# Altium PCB BugBusterMain.PcbDoc (part 5 of 6)
Units mm, origin at the board's own origin, x right, y up, seen from the top; angles counter-clockwise.
Board outline 110 x 80 mm, 6 copper layers (Top Layer, Inner Layer 1, Inner Layer 2, Inner Layer 3, Inner Layer 4, Bottom Layer), stack 1.546 mm thick; 244 components, 246 nets, 1173 pads, 1169 vias.
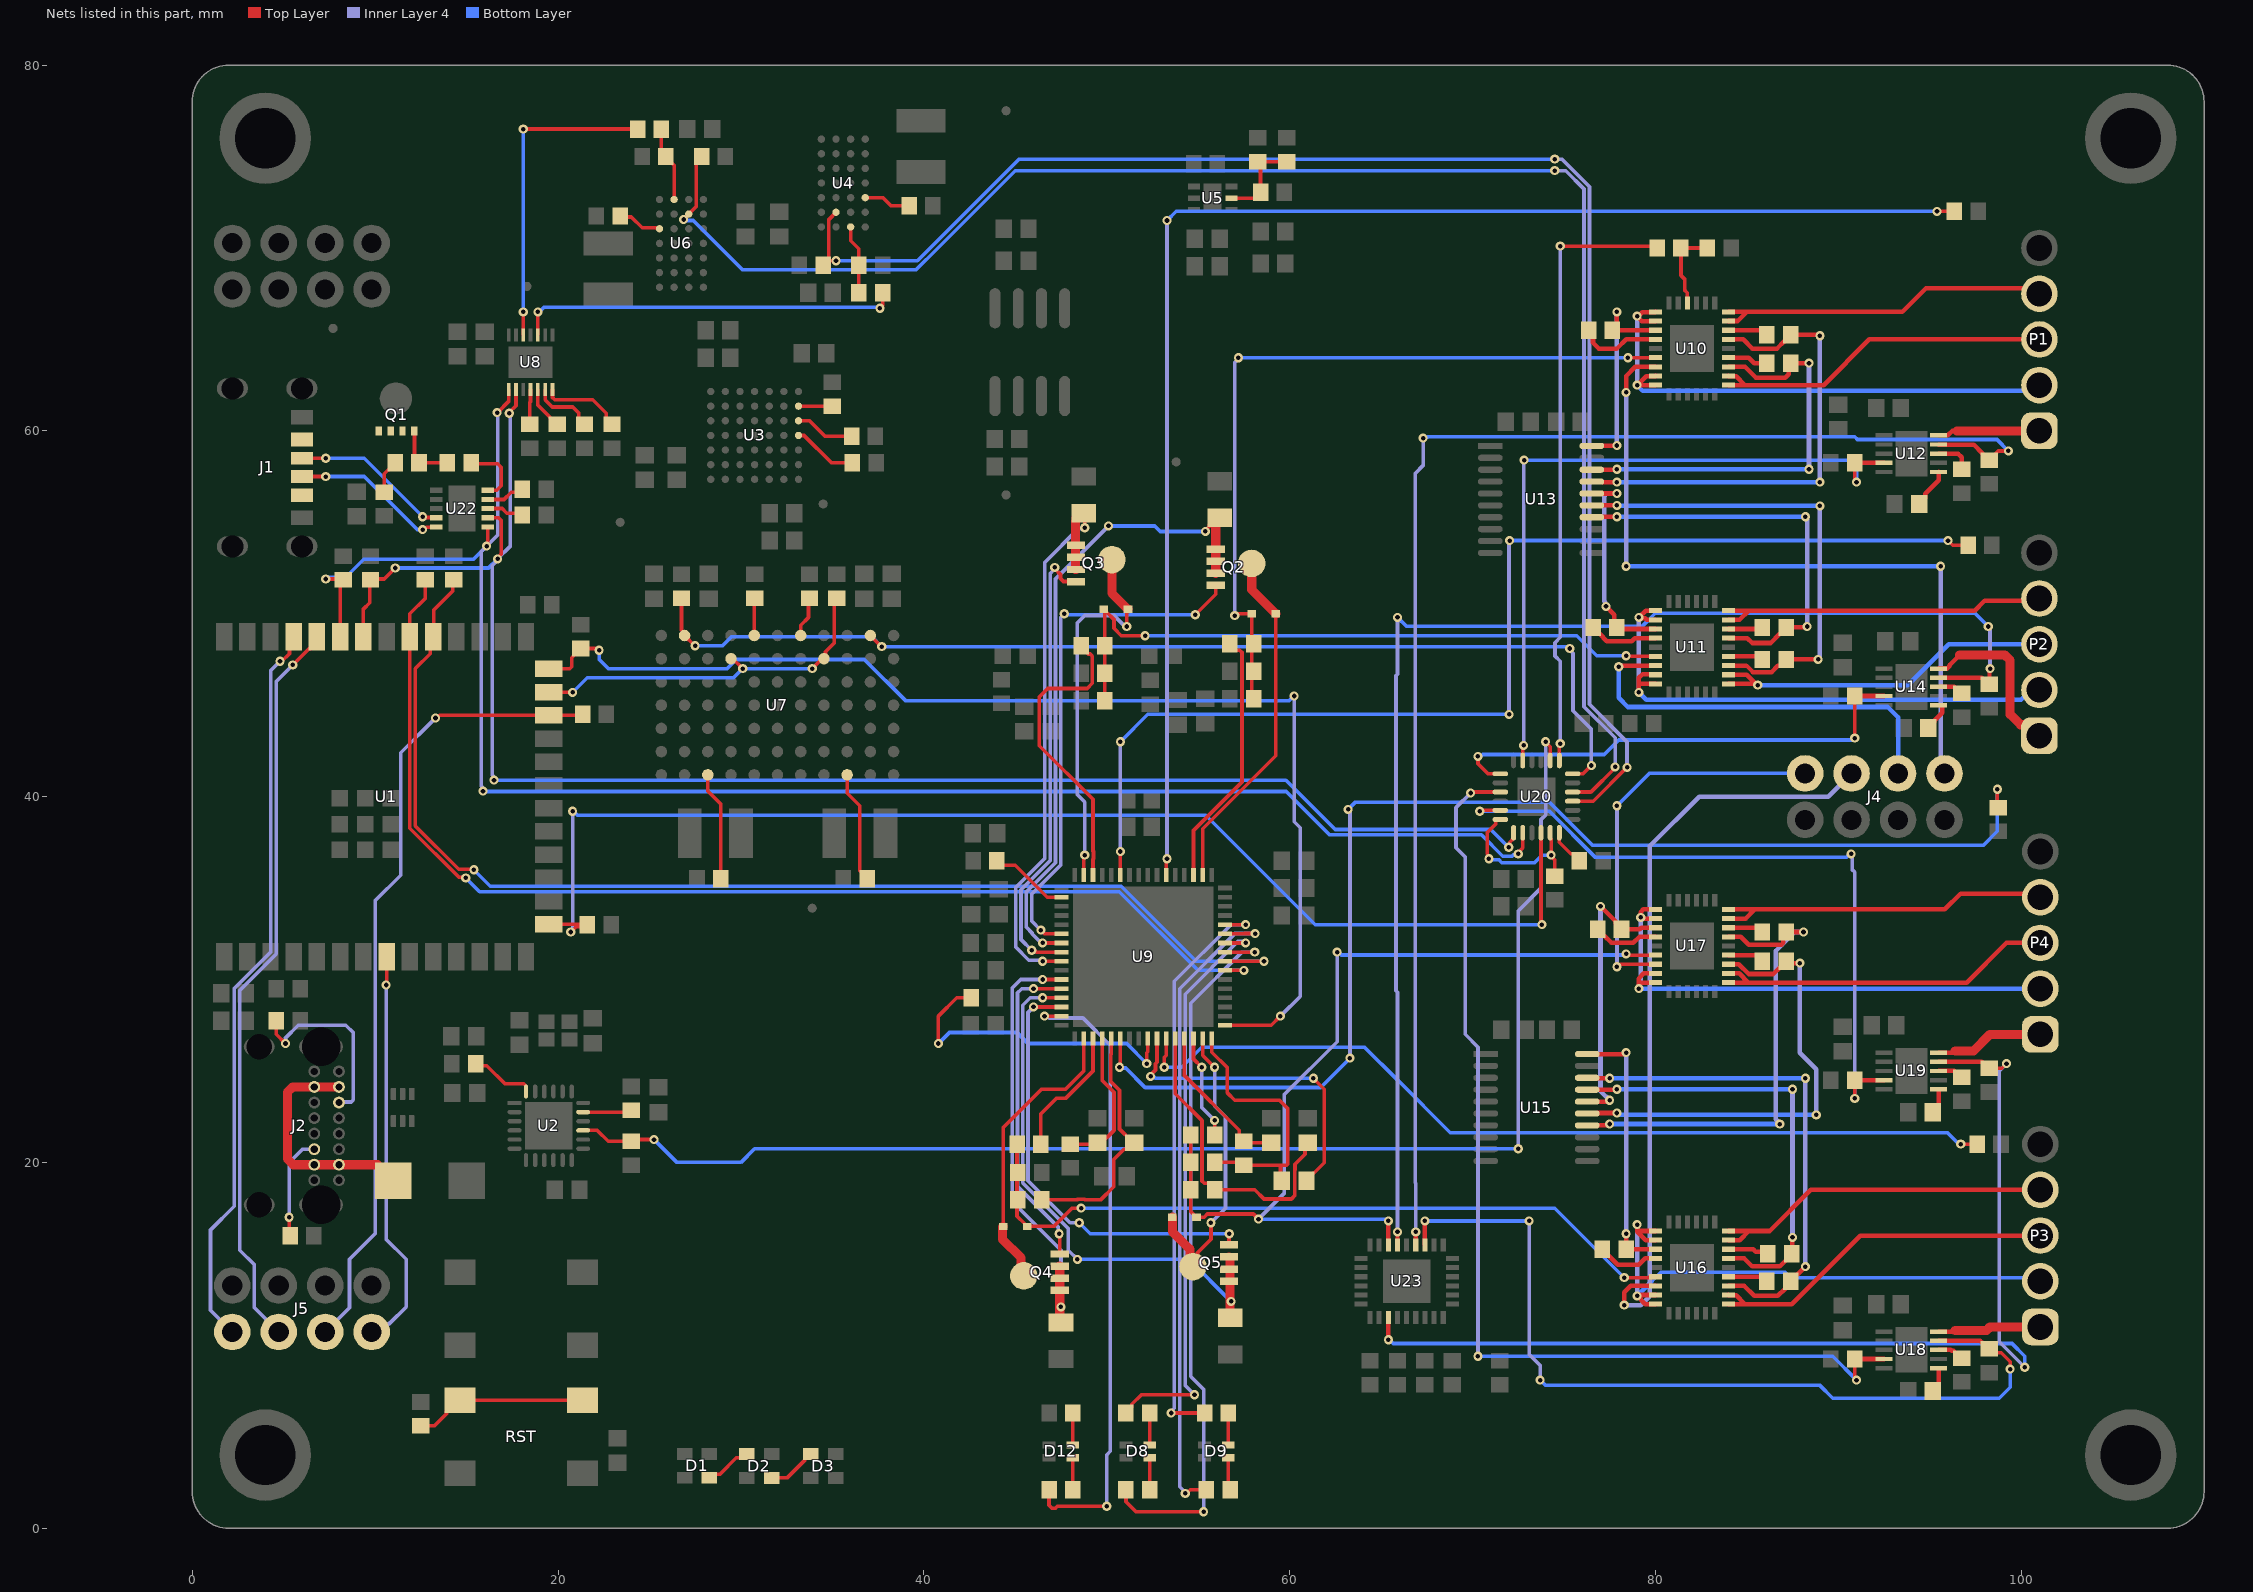
[diagram p7: the nets of this part, all layers, seen from the top]

## Via types
v1: diameter 0.6, hole 0.35, Top Layer to Bottom Layer, tented both sides, 608 vias
v2: diameter 0.5, hole 0.25, Top Layer to Bottom Layer, tented both sides, 555 vias
v3: diameter 0.45, hole 0.25, Top Layer to Bottom Layer, tented both sides, 6 vias

## Nets (pads, with @x,y where several pads share a name; then routed paths per layer and width w, separated by ;. In a path a pad name is that pad's centre, name@x,y a point inside that pad or via, vN(x,y) a via of type N, cw(c..) or ccw(c..) an arc to the next point about the centre after c; other vN are vias at no path point) (continued)
NetC52_1: C52.1 U9.42 | length 17.4
  Top Layer w0.2: v2(52.4,24.7) 52.4,24.781 52.669,25.05 52.669,25.398 52.75,25.479 U9.42@52.75,26.78 ; C52.1@60.925,19 60.925,19.05 61.275,19.4 61.325,19.4 61.9,19.975 61.9,24 v2(61.3,24.6)
  Bottom Layer w0.2: v2(52.4,24.7) 52.457,24.643 52.625,24.643 52.667,24.6 v2(61.3,24.6)
NetC52_2: C52.2 R58.1 R61.2 U9.48 | length 14.9
  Top Layer w0.2: U9.48@55.75,26.78 55.75,26.025 56.6,25.175 56.6,23.8 57,23.4 59.447,23.4 59.9,22.947 59.9,19.9 59.85,19.85 59.5,19.85 ; R58.1@55.9,20 57.35,20 R61.2@57.5,19.85 58.3,19.85 ; 58.4,19.85 59.5,19.85 ; C52.2@59.575,19 59.5,19.075 59.5,19.85
NetC53_1: C53.1 R59.1 U9.36 | length 7.9
  Top Layer w0.2: R59.1@48,21 49.425,21 C53.1@49.5,21.075 ; C53.1@49.613,20.962 50.4,21.75 50.4,23.841 49.75,24.491 U9.36@49.75,26.78
NetC54_1: C54.1 R60.1 U9.37 | length 13.4
  Top Layer w0.2: R60.1@46.45,17.95 48.375,17.95 48.402,17.977 48.798,17.977 48.825,17.95 49.667,17.95 50.389,18.672 50.389,20.164 50.95,20.725 51.1,20.725 51.375,21 51.375,21.15 50.7,21.825 50.7,23.95 50.223,24.427 50.223,25.898 50.25,25.925 U9.37@50.25,26.78
NetC55_1: C55.1 R61.1 U9.45 | length 8.5
  Top Layer w0.2: U9.45@54.25,26.78 54.25,24.75 57.242,21.758 57.242,21.408 57.575,21.075 C55.1@59,21.075
NetC56_1: C56.1 R62.1 U9.44 | length 17.2
  Top Layer w0.2: U9.44@53.75,26.78 53.75,23.75 55.214,22.286 55.214,18.986 55.338,18.862 55.575,18.862 55.9,18.537 R62.1@55.9,18.5 58.1,18.5 58.6,18 60.1,18 60.286,18.186 60.286,19.578 60.3,19.592 60.3,19.9 60.842,20.442 60.842,20.917 C56.1@61,21.075
NetC62_2: C62.2 U12.6 | length 2.2
  Top Layer w0.25: C62.2@94.425,56 94.75,56.325 94.75,56.55 95.491,57.291 U12.6@95.491,57.75
NetC68_2: C68.2 U14.6 | length 1.8
  Top Layer w0.25: C68.2@94.925,43.75 95.25,44.075 95.25,44.15 95.692,44.592 95.692,44.995 95.686,45 U14.6@95.491,45
NetC71_2: C71.2 U18.6 | length 1.4
  Top Layer w0.25: C71.2@95.175,7.5 95.491,7.816 U18.6@95.491,8.75
NetC74_2: C74.2 U19.6 | length 1.4
  Top Layer w0.25: C74.2@95.175,22.75 95.487,23.062 95.487,23.619 95.491,23.623 U19.6@95.491,24
NetD1_1: D1.1 D2.3 | length 2.6
  Top Layer w0.2: D1.1@28.279,2.758 28.477,2.956 28.856,2.956 29.75,3.85 30.125,3.85 D2.3@30.325,4.05
NetD2_1: D2.1 D3.3 | length 2.7
  Top Layer w0.2: D2.1@31.675,2.75 32.525,2.75 33.5,3.725 33.5,3.825 33.725,4.05 D3.3@33.825,4.05
NetD5_2: D5.2 J2.A4 J2.A9 J2.B4 J2.B9 | length 12.9
  Top Layer w0.5: J2.A4@8.025,24.125 J2.B9@6.675,24.125 5.493,24.125 5.2,23.832 5.2,20.2 5.525,19.875 J2.B4@6.675,19.875 J2.A9@8.025,19.875 10.125,19.875 D5.2@11,19
NetD6_1: D6.1 R42.2 R44.2 R47.2 U10.6 | length 42.6
  Top Layer w0.2: v2(57,49.9) 57.081,49.9 57.181,50 D6.1@57.93,50 57.93,45.461 R47.2@58.033,45.358 ; v2(78.5,64) U10.6@80.009,64
  Inner Layer 4 w0.2: v2(57,49.9) 57,63.733 57.2,63.933 v2(57.2,64)
  Bottom Layer w0.2: v2(57.2,64) v2(78.5,64)
NetD6_2: D6.2 Q2.5-6-7-8 U9.2 | length 19.2
  Top Layer w0.2: U9.2@55.25,35.72 55.25,38.241 59.25,42.241 D6.2@59.25,50
  Top Layer w0.5: Q2.5-6-7-8@57.93,52.75 57.93,51.32 D6.2@59.25,50
NetD7_1: D7.1 R43.2 R45.2 R49.2 U11.6 | length 36.6
  Top Layer w0.2: R49.2@49.9,45.25 R45.2@49.9,46.75 R43.2@49.9,48.25 49.9,50.19 D7.1@49.84,50.25 49.88,50.25 49.98,50.15 49.98,50.11 50.4,49.69 50.4,49.2 50.8,48.8 v2(52.1,48.8) ; v2(78.4,47.7) 78.433,47.667 U11.6@80.009,47.667
  Bottom Layer w0.2: v2(52.1,48.8) 75.7,48.8 76.8,47.7 v2(78.4,47.7)
NetD7_2: D7.2 Q3.5-6-7-8 U9.15 | length 21.1
  Top Layer w0.2: U9.15@48.75,35.72 48.75,36.75 v2(48.8,36.8) ; v2(51.1,49.3) 51.1,50.19 D7.2@51.16,50.25
  Top Layer w0.5: Q3.5-6-7-8@50.283,52.953 50.283,51.127 D7.2@51.16,50.25
  Inner Layer 4 w0.2: v2(48.8,36.8) 48.8,39.7 48.4,40.1 48.4,49.5 48.8,49.9 50.4,49.9 51,49.3 v2(51.1,49.3)
NetD8_1: D8.1 R97.2 | length 1.8
  Top Layer w0.2: R97.2@52.35,2.1 D8.1@52.35,3.85
NetD8_2: D8.2 R100.2 | length 1.8
  Top Layer w0.2: D8.2@52.35,4.55 R100.2@52.35,6.3
NetD9_1: D9.1 R98.2 | length 1.8
  Top Layer w0.2: D9.1@56.65,3.85 56.65,2.2 R98.2@56.75,2.1
NetD9_2: D9.2 R101.2 | length 1.8
  Top Layer w0.2: D9.2@56.65,4.55 R101.2@56.65,6.3
NetD10_1: D10.1 R54.2 R57.2 R60.2 U16.6 | length 41.1
  Top Layer w0.2: R54.2@45.1,21 45.1,17.06 45.52,16.64 45.52,16.6 45.62,16.5 D10.1@45.66,16.5 47.1,16.5 48.1,17.5 v2(48.6,17.5) ; v2(78.3,13.7) 79.638,13.7 79.648,13.71 79.968,13.71 U16.6@80.009,13.75
  Bottom Layer w0.2: v2(48.6,17.5) 74.5,17.5 v2(78.3,13.7)
NetD10_2: D10.2 Q4.5-6-7-8 U9.34 | length 16.1
  Top Layer w0.2: D10.2@44.34,16.5 44.34,21.91 46.43,24 47.75,24 48.75,25 U9.34@48.75,26.78
  Top Layer w0.5: D10.2@44.34,16.5 44.3,16.46 44.3,15.8 45.321,14.779 45.321,13.942 Q4.5-6-7-8@45.467,13.797
NetD11_1: D11.1 R55.2 R58.2 R62.2 U17.6 U23.7 | length 50.6
  Top Layer w0.2: R55.2@54.6,21.5 R58.2@54.6,20 R62.2@54.6,18.5 54.6,17.31 54.77,17.14 54.77,17.1 54.87,17 D11.1@54.91,17 54.917,17.007 55.333,17.007 55.502,17.177 58.023,17.177 v2(58.3,16.9) ; v2(78.4,31.4) 78.481,31.4 78.548,31.333 U17.6@80.009,31.333
  Top Layer w0.25: U23.7@65.4,15.492 v2(65.4,16.8)
  Inner Layer 4 w0.2: v2(58.3,16.9) 59.7,18.3 59.7,23.7 62.6,26.6 v2(62.6,31.5)
  Bottom Layer w0.2: v2(58.3,16.9) 65.219,16.9 65.319,16.8 v2(65.4,16.8) ; v2(62.6,31.5) 62.681,31.5 62.839,31.343 78.343,31.343 v2(78.4,31.4)
NetD11_2: D11.2 Q5.5-6-7-8 U9.47 | length 16.6
  Top Layer w0.2: Q5.5-6-7-8@54.546,14.467 54.967,14.888 54.967,15.067 55.7,15.8 v2(55.7,16.7) ; U9.47@55.25,26.78 55.25,25.85 v2(55.9,25.2)
  Top Layer w0.5: D11.2@53.59,17 53.59,16.21 54.546,15.254 Q5.5-6-7-8@54.546,14.467
  Inner Layer 4 w0.2: v2(55.7,16.7) 56.5,17.5 56.5,22.5 55.9,23.1 v2(55.9,25.2)
NetD12_1: D12.1 R99.2 | length 1.8
  Top Layer w0.2: R99.2@48.15,2.1 D12.1@48.15,3.85
NetD12_2: D12.2 R102.2 | length 1.8
  Top Layer w0.2: D12.2@48.15,4.55 R102.2@48.15,6.3
NetJ1_A5: J1.A5 U22.4 | length 8.7
  Top Layer w0.2: J1.A5@6,58.5 v2(7.3,58.5) ; v2(12.6,55.3) 12.642,55.258 13.334,55.258 U22.4@13.343,55.25
  Bottom Layer w0.2: v2(7.3,58.5) 9.4,58.5 v2(12.6,55.3)
NetJ1_A9: J1.A9 J1.B9 Q1.1 Q1.2 Q1.3 R8.2 R9.2 | length 1.9
  Top Layer w0.2: R8.2@10.5,56.65 10.5,57.65 10.725,57.875 10.775,57.875 11.1,58.2 R9.2@11.1,58.25
NetJ1_B5: J1.B5 U22.5 | length 8.6
  Top Layer w0.2: J1.B5@6,57.5 v2(7.3,57.5) ; v2(12.6,54.6) 12.681,54.6 12.81,54.729 13.321,54.729 U22.5@13.343,54.75
  Bottom Layer w0.2: v2(7.3,57.5) 9.4,57.5 12.3,54.6 v2(12.6,54.6)
NetJ2_A5: J2.A5 R13.1 | length 10.4
  Top Layer w0.2: R13.1@4.6,27.75 4.6,27 v2(5.1,26.5)
  Inner Layer 4 w0.2: v2(5.1,26.5) 5.1,26.8 5.8,27.5 8.4,27.5 8.8,27.1 8.8,23.417 8.683,23.3 8.05,23.3 J2.A5@8.025,23.275
NetJ2_B5: J2.B5 R14.1 | length 5.8
  Top Layer w0.2: v2(5.3,17) 5.3,16.05 R14.1@5.35,16
  Inner Layer 4 w0.2: v2(5.3,17) 5.3,20 6.025,20.725 J2.B5@6.675,20.725
  Bottom Layer w0.2: v2(5.3,17) v2@5.3,17.1
NetJ4_1: J4.1 U10.7 | length 40.8
  Top Layer w0.25: v2(78.4,62.1) 78.4,63 78.9,63.5 U10.7@80.009,63.5
  Inner Layer 4 w0.25: v2(78.4,52.6) 78.4,56.99 78.402,56.992 78.402,57.408 78.4,57.41 78.4,57.69 78.402,57.692 78.402,58.108 78.4,58.11 v2(78.4,62.1) ; v2(95.6,52.6) 95.6,41.48 J4.1@95.81,41.27
  Bottom Layer w0.25: v2(78.4,52.6) v2(95.6,52.6)
NetJ4_2: J4.2 U11.7 | length 22.6
  Top Layer w0.25: v2(78,47.1) 78,47.2 78.033,47.167 U11.7@80.009,47.167
  Bottom Layer w0.25: v2(78,47.1) 78,45.4 78.5,44.9 92.7,44.9 93.27,44.33 J4.2@93.27,41.27
NetJ4_3: J4.3 U16.7 | length 41.4
  Top Layer w0.25: v2(78.3,12.2) 78.3,12.9 78.65,13.25 U16.7@80.009,13.25
  Inner Layer 4 w0.25: v2(78.3,12.2) 78.79,12.2 78.792,12.198 79.208,12.198 79.702,12.692 79.702,37.302 82.4,40 89.46,40 J4.3@90.73,41.27
NetJ4_4: J4.4 U17.7 | length 22
  Top Layer w0.2: v2(77.9,30.7) 77.981,30.7 78.115,30.833 U17.7@80.009,30.833
  Inner Layer 4 w0.2: v2(77.9,30.7) v2(77.9,39.5)
  Bottom Layer w0.2: v2(77.9,39.5) 79.67,41.27 J4.4@88.19,41.27
NetJ5_5: J5.5 U1.37 | length 40.5
  Top Layer w0.2: v2(4.8,47.4) 4.9,47.4 5.317,47.817 5.317,48.517 U1.37@5.55,48.75
  Inner Layer 4 w0.2: J5.5@2.19,10.73 1,11.92 1,16.3 2.3,17.6 2.3,29.509 4.3,31.509 4.3,46.9 v2(4.8,47.4)
NetJ5_6: J5.6 U1.36 | length 40.7
  Top Layer w0.2: v2(5.5,47.2) 6.4,48.1 6.47,48.1 6.82,48.45 U1.36@6.82,48.75
  Inner Layer 4 w0.2: J5.6@4.73,10.73 3.4,12.06 3.4,14.4 2.6,15.2 2.6,29.4 4.6,31.4 4.6,46.3 v2(5.5,47.2)
NetJ5_7: J5.7 R7.2 U1.24 | length 44.2
  Top Layer w0.2: v2(13.3,44.3) 13.381,44.3 13.526,44.445 U1.24@19.5,44.445 21.295,44.445 R7.2@21.35,44.5
  Inner Layer 4 w0.2: J5.7@7.27,10.73 8.6,12.06 8.6,14.7 10,16.1 10,34.3 11.4,35.7 11.4,42.4 v2(13.3,44.3)
NetJ5_8: J5.8 U1.8 | length 22.1
  Top Layer w0.2: v2(10.6,29.7) 10.63,29.73 U1.8@10.63,31.25
  Inner Layer 4 w0.2: J5.8@9.81,10.73 10.297,10.73 10.756,11.189 10.789,11.189 11.7,12.1 11.7,14.7 10.6,15.8 v2(10.6,29.7)
NetP1_1: P1.1 U12.10 | length 5.6
  Top Layer w0.25: U12.10@95.491,59.75 95.996,59.75 96.246,60 96.5,60
  Top Layer w0.5: 96.5,60 P1.1@101,60
NetP1_2: P1.2 U10.1 U10.2 U10.8 U10.9 | length 30.5
  Top Layer w0.25: v2(79,66.277) 79,66.268 79.268,66 U10.2@80.009,66 ; v2@79.038,66.238 79.038,66.248 79.28,66.49 79.998,66.49 U10.1@80.009,66.5 ; U10.9@80.009,62.5 v2(79,62.5) 79.492,62.992 80.001,62.992 U10.8@80.009,63
  Inner Layer 4 w0.25: v2(79,62.5) 79,63.79 79.002,63.792 79.002,64.202 79,64.204 v2(79,66.277)
  Bottom Layer w0.25: v2(79,62.5) 79.3,62.2 100.7,62.2 P1.2@101,62.5
NetP1_3: P1.3 U10.16 U10.17 | length 19.2
  Top Layer w0.25: U10.16@83.992,62.5 84.9,62.5 ; U10.17@83.992,63 84.007,62.985 84.415,62.985 84.9,62.5 ; P1.3@101,65 91.7,65 89.2,62.5 84.9,62.5
NetP1_4: P1.4 U10.23 U10.24 | length 18.9
  Top Layer w0.25: U10.23@83.992,66 83.999,66.008 84.508,66.008 85,66.5 ; U10.24@83.992,66.5 85,66.5 ; P1.4@101,67.5 100.7,67.8 94.8,67.8 93.5,66.5 85,66.5
NetP2_1: P2.1 U14.10 | length 9.4
  Top Layer w0.25: U14.10@95.491,47 95.496,47.005 95.954,47.005 96.1,47.152 96.1,47.2 96.646,47.746
  Top Layer w0.5: 96.646,47.746 99.107,47.746 99.4,47.453 99.4,44.5 99.971,43.929 100.404,43.929 P2.1@101,43.333
NetP2_2: P2.2 U11.1 U11.2 U11.8 U11.9 | length 31.2
  Top Layer w0.25: v2(79.1,45.7) 79.1,46.1 ; U11.9@80.009,46.167 79.167,46.167 79.1,46.1 ; U11.8@80.009,46.667 79.993,46.682 79.677,46.682 79.659,46.7 79.3,46.7 79.1,46.5 79.1,46.1 ; U11.2@80.009,49.667 79.533,49.667 79.442,49.758 79.142,49.758 v2(79.1,49.8) 79.467,50.167 U11.1@80.009,50.167
  Inner Layer 4 w0.25: v2(79.1,45.7) v2(79.1,49.8)
  Bottom Layer w0.25: v2(79.1,45.7) 79.5,45.3 99.993,45.3 100.526,45.833 P2.2@101,45.833
NetP2_3: P2.3 U11.16 U11.17 | length 19.7
  Top Layer w0.25: U11.16@83.992,46.167 85.466,46.167 v2@85.532,46.1 ; U11.17@83.992,46.667 85.002,46.667 85.468,46.2 85.5,46.2 v2(85.6,46.1)
  Bottom Layer w0.25: v2(85.6,46.1) 93.8,46.1 96.033,48.333 P2.3@101,48.333
NetP2_4: P2.4 U11.23 U11.24 | length 18.6
  Top Layer w0.25: U11.23@83.992,49.667 84.6,49.667 85.1,50.167 ; U11.24@83.992,50.167 85.1,50.167 ; P2.4@101,50.833 100.867,50.7 98,50.7 97.467,50.167 85.1,50.167
NetP3_1: P3.1 U18.10 | length 5.7
  Top Layer w0.25: U18.10@95.491,10.75 96.35,10.75 96.4,10.8
  Top Layer w0.5: 96.4,10.8 98.1,10.8 98.3,11 P3.1@101.05,11
NetP3_2: P3.2 U16.1 U16.2 U16.8 U16.9 | length 31.6
  Top Layer w0.25: v2(79,16.6) 79,16.2 ; U16.9@80.009,12.25 79.45,12.25 v2(79,12.7) 79.068,12.7 79.118,12.75 U16.8@80.009,12.75 ; U16.2@80.009,15.75 79.993,15.735 79.465,15.735 79,16.2 ; U16.1@80.009,16.25 79.05,16.25 79,16.2
  Inner Layer 4 w0.25: v2(79,12.7) v2(79,16.6)
  Bottom Layer w0.2: 79.8,13.5 80.3,14 87.1,14 87.4,13.7 100.85,13.7 P3.2@101.05,13.5
  Bottom Layer w0.25: v2(79,12.7) 79.8,13.5
NetP3_3: P3.3 U16.16 U16.17 | length 19.7
  Top Layer w0.25: U16.16@83.992,12.25 84.9,12.25 ; U16.17@83.992,12.75 84.007,12.735 84.415,12.735 84.9,12.25 ; P3.3@101.05,16 91.2,16 87.45,12.25 84.9,12.25
NetP3_4: P3.4 U16.23 U16.24 | length 19.3
  Top Layer w0.25: U16.23@83.992,15.75 84.621,15.75 85.121,16.25 ; U16.24@83.992,16.25 85.121,16.25 ; P3.4@101.05,18.5 88.5,18.5 86.25,16.25 85.121,16.25
NetP4_1: P4.1 U19.10 | length 6
  Top Layer w0.25: U19.10@95.491,26 96.3,26 96.4,26.1
  Top Layer w0.5: 96.4,26.1 97.4,26.1 98.3,27 P4.1@101.05,27
NetP4_2: P4.2 U17.1 U17.2 U17.8 U17.9 | length 30.5
  Top Layer w0.25: 79.086,29.87 79.082,29.875 79.082,30.046 ; v2(79.1,29.5) 79.082,29.518 79.082,30.046 ; 79.122,29.835 U17.9@80.007,29.835 ; U17.8@80.009,30.333 79.369,30.333 79.082,30.046 ; U17.2@80.009,33.333 79.334,33.333 79.268,33.4 v2(79.2,33.4) 79.2,33.687 79.346,33.833 U17.1@80.009,33.833
  Inner Layer 4 w0.25: v2(79.1,29.5) 79.148,29.548 79.148,29.719 79.2,29.771 v2(79.2,33.4)
  Bottom Layer w0.25: v2(79.1,29.5) P4.2@101.05,29.5
NetP4_3: P4.3 U17.16 U17.17 | length 19.5
  Top Layer w0.25: U17.16@83.992,29.833 85.367,29.833 ; U17.17@83.992,30.333 84.587,30.333 85.087,29.833 85.367,29.833 ; P4.3@101.05,32 99.2,32 97.033,29.833 85.367,29.833
NetP4_4: P4.4 U17.23 U17.24 | length 19.1
  Top Layer w0.25: U17.23@83.992,33.333 84.933,33.333 85.433,33.833 ; U17.24@83.992,33.833 85.433,33.833 ; P4.4@101.05,34.5 100.85,34.7 96.7,34.7 95.833,33.833 85.433,33.833
NetQ1_4: Q1.4 R9.1 R10.2 | length 3.4
  Top Layer w0.2: Q1.4@12.15,60 12.15,58.5 ccw(c12.4,58.5) R9.1@12.4,58.25 R10.2@13.95,58.25
NetQ2_1: Q2.1 Q2.2 Q2.3 R39.1 U9.23 | length 35.8
  Top Layer w0.2: v2(46.5,32) U9.23@47.53,32 ; v2(55.4,54.5) 55.4,54.562 55.605,54.767 55.605,54.85 56.005,55.25 R39.1@56.18,55.25
  Top Layer w0.5: Q2.3@55.961,52.217 Q2.2@55.961,52.877 Q2.1@55.961,53.537 55.961,55.031 R39.1@56.18,55.25
  Inner Layer 4 w0.2: v2(46.5,32) 46.425,32 45.923,32.502 45.923,32.544 45.6,32.867 45.6,34.783 47.2,36.383 47.2,51.9 v2(50.1,54.8)
  Bottom Layer w0.2: v2(50.1,54.8) 52.627,54.8 52.927,54.5 v2(55.4,54.5)
NetQ2_4: Q2.4 U9.22 | length 28.7
  Top Layer w0.2: v2(46.4,32.7) 46.6,32.5 U9.22@47.53,32.5 ; v2(54.843,49.943) 55.961,51.061 Q2.4@55.961,51.556
  Inner Layer 4 w0.2: v2(46.4,32.7) 45.9,33.2 45.9,34.674 47.489,36.263 47.489,49.812 v2(47.677,50)
  Bottom Layer w0.2: v2(47.677,50) 47.734,49.943 v2(54.843,49.943)
NetQ3_1: Q3.1 Q3.2 Q3.3 R40.1 U9.25 | length 31.7
  Top Layer w0.2: v2(46.5,31) U9.25@47.53,31 ; R40.1@48.75,55.5 48.8,55.45 v2(48.8,54.7)
  Top Layer w0.5: Q3.3@48.315,52.42 48.3,52.435 48.3,55.05 48.325,55.075 48.325,55.25 48.575,55.5 R40.1@48.75,55.5
  Inner Layer 4 w0.2: v2(46.5,31) 46.443,31.057 45.743,31.057 45.022,31.778 45.022,35.031 46.622,36.631 46.622,52.822 48.461,54.661 48.761,54.661 v2(48.8,54.7)
NetQ3_4: Q3.4 U9.24 | length 25.3
  Top Layer w0.2: v2(45.9,31.6) 45.957,31.543 46.125,31.543 46.167,31.5 U9.24@47.53,31.5 ; v2(47.163,52.537) 47.163,52.456 47.472,52.146 47.472,51.928 47.637,51.763 48.311,51.763 Q3.4@48.315,51.759
  Inner Layer 4 w0.2: v2(45.9,31.6) 45.311,32.189 45.311,34.903 46.911,36.503 46.911,52.205 47.163,52.456 v2(47.163,52.537)
NetQ4_1: Q4.1 Q4.2 Q4.3 R52.1 U9.27 | length 24.5
  Top Layer w0.2: v2(46.5,30) U9.27@47.53,30
  Top Layer w0.5: Q4.3@47.435,14.33 47.435,11.315 R52.1@47.5,11.25
  Inner Layer 4 w0.2: v2(46.5,30) 45.3,30 44.833,29.533 44.833,17.867 47.5,15.2 v2(47.5,12.1)
NetQ4_4: Q4.4 U9.28 | length 17.7
  Top Layer w0.2: v2(46,29.5) U9.28@47.53,29.5 ; v2(47.4,16.1) 47.435,16.065 Q4.4@47.435,14.991
  Inner Layer 4 w0.2: v2(46,29.5) 45.351,29.5 45.122,29.271 45.122,18.678 47.361,16.439 47.361,16.139 v2(47.4,16.1)
NetQ5_1: Q5.1 Q5.2 Q5.3 R53.1 U9.29 | length 30.1
  Top Layer w0.2: v2(46.5,29) U9.29@47.53,29
  Top Layer w0.5: Q5.3@56.685,14.83 56.703,14.83 56.75,14.783 R53.1@56.75,11.5
  Inner Layer 4 w0.2: v2(46.5,29) 45.825,29 45.411,28.586 45.411,18.88 47.9,16.391 47.9,15.2 v2(48.4,14.7)
  Bottom Layer w0.2: v2(48.4,14.7) 54.5,14.7 v2(56.8,12.4)
NetQ5_4: Q5.4 U9.30 | length 24
  Top Layer w0.2: v2(46,28.5) U9.30@47.53,28.5 ; Q5.4@56.685,15.491 56.689,15.494 56.689,16.089 v2(56.7,16.1)
  Inner Layer 4 w0.2: v2(46,28.5) 45.7,28.2 45.7,19 48,16.7 v2(48.5,16.7)
  Bottom Layer w0.2: v2(48.5,16.7) 49.1,16.1 v2(56.7,16.1)
NetR1_1: R1.1 U1.35 U8.1 U20.20 U22.6 | length 96.8
  Top Layer w0.2: v2(7.3,51.9) 8.2,51.9 R1.1@8.25,51.85 8.09,51.69 U1.35@8.09,48.75 ; v2(16.1,53.7) 16.1,53.781 16.157,53.839 U22.6@16.157,54.75 ; v2(16.673,61) 16.7,61 17.298,61.598 17.298,62.25 U8.1@17.3,62.251 ; v2(72.5,36.866) 72.5,36.947 72.75,37.197 U20.20@72.75,38.025
  Inner Layer 4 w0.2: v2(15.9,40.3) 15.843,40.357 15.843,40.525 15.8,40.567 15.8,53.4 v2(16.1,53.7) 16.7,54.3 16.7,60.973 v2(16.673,61)
  Bottom Layer w0.2: v2(7.3,51.9) 7.4,52 8.4,52 9.377,52.977 15.377,52.977 v2(16.1,53.7) ; v2(15.9,40.3) 15.923,40.277 59.814,40.277 62.18,37.911 70.489,37.911 71.657,36.743 72.177,36.743 72.243,36.808 72.443,36.808 v2(72.5,36.866)
NetR2_1: R2.1 U1.34 U8.2 U20.19 U22.7 | length 93.6
  Top Layer w0.2: U1.34@9.36,48.75 9.36,50.26 9.7,50.6 9.7,51.8 9.8,51.9 10.5,51.9 v2(11.1,52.5) ; U22.7@16.157,55.25 16.75,55.25 16.9,55.1 16.9,53.267 16.7,53.067 v2(16.7,53) ; v2(17.337,60.963) 17.337,61.015 17.7,61.378 U8.2@17.7,62.251 ; v2(71.988,37.228) 72.046,37.285 72.046,37.512 72.25,37.716 U20.19@72.25,38.025
  Inner Layer 4 w0.2: v2(16.5,40.9) 16.443,40.957 16.443,41.125 16.4,41.167 16.4,52.619 16.7,52.919 v2(16.7,53) 17.398,53.698 17.398,60.733 17.357,60.773 17.357,60.943 v2(17.337,60.963)
  Bottom Layer w0.2: v2(11.1,52.5) 16.2,52.5 v2(16.7,53) ; v2(16.5,40.9) 59.8,40.9 62.5,38.2 71,38.2 71.972,37.228 v2(71.988,37.228)
NetR4_2: R4.2 RST.A1 RST.A2 | length 9.5
  Top Layer w0.2: R4.2@12.5,5.6 13.25,5.6 13.9,6.25 13.9,6.4 14.5,7 RST.A1@14.65,7 RST.A2@21.35,7
NetR6_2: R6.2 U1.15 U20.22 | length 70.4
  Top Layer w0.2: U1.15@19.5,33.015 21.585,33.015 21.462,32.892 20.992,32.892 v2(20.7,32.6) ; U20.22@73.75,38.025 73.75,33.05 v2(73.8,33)
  Inner Layer 4 w0.2: v2(20.7,32.6) 20.7,32.681 20.8,32.781 v2(20.8,39.2)
  Bottom Layer w0.2: v2(20.8,39.2) 20.851,39.2 21.067,38.984 55.416,38.984 61.4,33 v2(73.8,33)
NetR10_1: R10.1 U22.10 | length 3.6
  Top Layer w0.2: R10.1@15.25,58.25 15.3,58.2 16.7,58.2 16.9,58 16.9,57 16.652,56.752 16.16,56.752 U22.10@16.157,56.75
NetR11_1: R11.1 U22.9 | length 2.1
  Top Layer w0.2: U22.9@16.157,56.25 17.05,56.25 17.442,56.642 17.892,56.642 R11.1@18.05,56.8
NetR12_1: R12.1 U22.8 | length 2
  Top Layer w0.2: U22.8@16.157,55.75 16.95,55.75 17.2,55.5 17.95,55.5 R12.1@18.05,55.4
NetR15_2: R15.2 U2.15 U20.8 | length 76.2
  Top Layer w0.2: U2.15@21.376,21.75 22.15,21.75 22.75,21.15 R15.2@24,21.15 24.1,21.25 v2(25.25,21.25) ; v2(74,43) 74,42.983 74.25,42.733 U20.8@74.25,41.975
  Inner Layer 4 w0.2: v2(72.5,20.75) 72.5,33.75 73.75,35 73.75,38.75 74,39 v2(74,43)
  Bottom Layer w0.2: v2(25.25,21.25) 26.5,20 30,20 30.75,20.75 v2(72.5,20.75)
NetR16_2: R16.2 U2.17 | length 2.7
  Top Layer w0.2: U2.17@21.376,22.75 23.9,22.75 R16.2@24,22.85
NetR17_2: R17.2 U2.24 | length 3.6
  Top Layer w0.2: R17.2@15.5,25.4 15.608,25.292 16.108,25.292 17.1,24.3 18.133,24.3 18.242,24.19 18.242,23.883 U2.24@18.25,23.876
NetR18_2: R18.2 U3.B7 | length 1.9
  Top Layer w0.2: U3.B7@33.15,61.35 R18.2@35,61.35
NetR19_2: R19.2 U4.B3 U20.3 | length 84.1
  Top Layer w0.2: R19.2@34.5,69.05 34.811,69.361 34.811,71.561 U4.B3@35.2,71.95 ; R19.2@34.75,69.3 v2(35.2,69.3) ; U20.3@75.475,39.75 76.604,39.75 v2(78.454,41.6)
  Inner Layer 4 w0.2: v2(74.5,74.854) 74.895,74.854 76.4,73.349 76.4,45.045 78.454,42.991 v2(78.454,41.6)
  Bottom Layer w0.2: v2(35.2,69.3) 39.651,69.3 45.205,74.854 v2(74.5,74.854)
NetR20_2: R20.2 R24.1 U4.A2 | length 3.8
  Top Layer w0.2: U4.A2@36,71.15 36,70.4 36.45,69.95 R24.1@36.45,67.55
NetR21_2: R21.2 U3.D7 | length 3.6
  Top Layer w0.2: U3.D7@33.15,59.75 33.154,59.746 33.454,59.746 34.95,58.25 R21.2@36.1,58.25
NetR22_1: R22.1 R104.1 R105.2 U5.2 | length 5.1
  Top Layer w0.2: U5.2@56.815,72.718 58.089,72.718 R22.1@58.414,73.043 58.414,74.556 R105.2@58.256,74.714 R104.1@59.856,74.714
NetR23_2: R23.2 U3.C7 | length 3.3
  Top Layer w0.2: U3.C7@33.15,60.55 33.75,60.55 34.6,59.7 R23.2@36.05,59.7
NetR24_2: R24.2 U8.10 | length 21
  Top Layer w0.2: U8.10@18.9,65.249 v2(18.9,66.5) ; v2(37.6,66.7) 37.75,66.85 R24.2@37.75,67.55
  Bottom Layer w0.2: v2(18.9,66.5) 18.981,66.5 19.235,66.754 37.546,66.754 v2(37.6,66.7)
NetR25_2: R25.2 U4.C1 | length 2.6
  Top Layer w0.2: U4.C1@36.8,72.75 37.775,72.75 38.225,72.3 R25.2@39.2,72.3
NetR26_2: R26.2 U6.B3 U20.4 | length 92.1
  Top Layer w0.2: v2(26.87,71.554) 26.87,71.562 27.15,71.842 U6.B3@27.15,71.85 27.561,72.261 27.561,74.711 R26.2@27.85,75 ; U20.4@75.475,40.25 76.477,40.25 77.803,41.576 v2(77.803,41.624)
  Inner Layer 4 w0.2: v2(74.5,74.227) 75.097,74.227 76.1,73.224 76.1,44.92 77.803,43.217 v2(77.803,41.624)
  Bottom Layer w0.2: v2(26.87,71.554) 26.924,71.5 27.4,71.5 30.1,68.8 39.56,68.8 40.122,69.362 40.138,69.362 45.003,74.227 v2(74.5,74.227)
NetR27_2: R27.2 R28.1 U6.A2 | length 4.1
  Top Layer w0.2: R28.1@25.65,76.5 25.65,75.25 R27.2@25.9,75 ; R27.2@25.9,74.95 26.225,74.625 26.233,74.625 26.35,74.508 U6.A2@26.35,72.65
NetR28_2: R28.2 U8.12 | length 17.5
  Top Layer w0.2: U8.12@18.1,65.249 v2(18.1,66.5) ; v2(18.1,76.5) R28.2@24.35,76.5
  Bottom Layer w0.2: v2(18.1,66.5) v2(18.1,76.5)
NetR29_2: R29.2 U6.C1 | length 2.4
  Top Layer w0.2: R29.2@23.4,71.75 23.458,71.692 24.008,71.692 24.6,71.1 25.359,71.1 25.37,71.088 25.512,71.088 U6.C1@25.55,71.05
NetR30_1: R30.1 U7.C1 | length 6
  Top Layer w0.2: U7.C1@28.19,41.19 28.19,40.31 28.9,39.6 R30.1@28.9,35.5
NetR31_2: R31.2 U7.B7 U7.K7 U20.6 | length 60.2
  Top Layer w0.2: R31.2@26.75,50.85 26.75,49.096 26.92,48.926 U7.B7@26.92,48.81 27.48,48.25 v2(27.5,48.25) ; U7.K7@37.08,48.81 37.69,48.2 v2(37.7,48.2) ; U20.6@75.475,41.25 76.05,41.25 v2(76.5,41.7)
  Inner Layer 4 w0.2: v2(75.323,48.1) 75.323,48.019 75.5,47.842 75.5,44.7 76.5,43.7 v2(76.5,41.7)
  Bottom Layer w0.2: v2(27.5,48.25) 29,48.25 29.5,48.75 37.15,48.75 v2(37.7,48.2) 75.142,48.2 75.242,48.1 v2(75.323,48.1)
NetR32_2: R32.2 U8.7 | length 4.5
  Top Layer w0.2: U8.7@19.7,62.251 19.702,62.25 19.702,61.817 19.819,61.7 21.9,61.7 22.642,60.958 22.642,60.658 R32.2@22.95,60.35
NetR33_2: R33.2 U7.E7 | length 2
  Top Layer w0.2: U7.E7@30.73,48.81 30.73,50.83 R33.2@30.75,50.85
NetR34_2: R34.2 U8.6 | length 3.4
  Top Layer w0.2: U8.6@19.3,62.251 19.3,61.691 19.691,61.3 20.8,61.3 21.142,60.958 21.142,60.658 R34.2@21.45,60.35
NetR35_2: R35.2 U8.5 | length 2.4
  Top Layer w0.2: U8.5@18.9,62.251 18.9,61.4 19.575,60.725 19.575,60.675 19.9,60.35 R35.2@19.95,60.35
NetR36_2: R36.2 U8.4 | length 1.9
  Top Layer w0.2: R36.2@18.45,60.35 18.45,61.55 18.5,61.6 U8.4@18.5,62.251
NetR37_1: R37.1 U7.J1 | length 6.1
  Top Layer w0.2: U7.J1@35.81,41.19 35.81,40.19 36.5,39.5 36.5,35.95 36.9,35.55 R37.1@36.9,35.5
NetR38_2: R38.2 U7.G7 | length 2.2
  Top Layer w0.2: U7.G7@33.27,48.81 33.27,49.37 33.7,49.8 33.7,50.8 R38.2@33.75,50.85
NetR41_1: R41.1 U9.41 | length 17.5
  Top Layer w0.2: v2(40.8,26.5) 40.8,28 41.8,29 R41.1@42.6,29 ; v2(52.192,25.4) 52.198,25.406 52.198,25.993 52.25,26.044 U9.41@52.25,26.78
  Bottom Layer w0.2: v2(40.8,26.5) 41.4,27.1 45.1,27.1 45.7,26.5 51.092,26.5 v2(52.192,25.4)
NetR42_1: R42.1 U9.3 | length 14.1
  Top Layer w0.2: U9.3@54.75,35.72 54.75,38.15 57.4,40.8 57.4,47.883 57.283,48 57.058,48 56.733,48.325 R42.1@56.733,48.358
NetR43_1: R43.1 U9.14 | length 16.5
  Top Layer w0.2: R43.1@48.6,48.25 48.6,48.2 49,47.8 49.097,47.8 49.214,47.683 49.214,46.197 48.931,45.914 46.772,45.914 46.311,45.453 46.311,42.789 49.25,39.85 49.25,37.025 49.277,36.998 49.277,36.602 49.25,36.575 U9.14@49.25,35.72
NetR50_1: R50.1 U9.6 | length 79.1
  Top Layer w0.2: U9.6@53.25,35.72 53.25,36.55 v2(53.3,36.6) ; v2(95.4,72) R50.1@96.35,72
  Inner Layer 4 w0.2: v2(53.3,36.6) v2(53.3,71.5)
  Bottom Layer w0.2: v2(53.3,71.5) 53.8,72 v2(95.4,72)
NetR51_1: R51.1 U9.11 | length 63.8
  Top Layer w0.2: U9.11@50.75,35.72 v2(50.75,37) ; v2(96,54) 96.017,54 96.267,53.75 R51.1@97.1,53.75
  Inner Layer 4 w0.2: v2(50.75,37) v2(50.75,43) ; v2(72,44.5) 72,53.973 v2(72.029,54.001)
  Bottom Layer w0.2: v2(50.75,43) 52.25,44.5 v2(72,44.5) ; v2(72.029,54.001) 95.999,54.001 v2(96,54)
NetR54_1: R54.1 U9.35 | length 7.3
  Top Layer w0.2: R54.1@46.4,21 46.4,22.65 47.25,23.5 47.75,23.5 49.25,25 U9.35@49.25,26.78
NetR55_1: R55.1 U9.46 | length 5.8
  Top Layer w0.2: U9.46@54.75,26.78 54.75,25.654 55.2,25.204 v2(55.2,25.2) ; R55.1@55.9,21.5 v2(55.9,22.3)
  Inner Layer 4 w0.2: v2(55.2,25.2) 55.2,23 v2(55.9,22.3)
NetR56_2: R56.2 U1.26 U9.49 | length 64.8
  Top Layer w0.2: U1.26@19.5,46.985 20.633,46.985 20.75,47.102 20.75,47.6 20.875,47.725 20.875,47.775 21.2,48.1 R56.2@21.25,48.1 22.069,48.1 22.169,48 v2(22.25,48) ; U9.49@56.47,27.5 58.998,27.5 v2(59.5,28.002)
  Inner Layer 4 w0.2: v2(59.5,28.002) 59.502,28.002 60.577,29.077 60.577,38.298 60.25,38.625 v2(60.25,45.5)
  Bottom Layer w0.2: v2(22.25,48) 22.25,47.5 22.75,47 29.25,47 29.75,47.5 36.75,47.5 39,45.25 59.983,45.25 60.233,45.5 v2(60.25,45.5)
NetR63_2: R63.2 U1.31 U9.56 | length 65.9
  Top Layer w0.2: R63.2@14.3,51.85 14.242,51.792 14.242,51.242 13.2,50.2 13.2,48.78 13.017,48.597 13.017,47.817 12.2,47 12.2,38.4 14.566,36.034 15.366,36.034 v2(15.4,36) ; U9.56@56.47,31 v2(58.6,31)
  Bottom Layer w0.2: v2(15.4,36) 16.3,35.1 50.8,35.1 54.9,31 v2(58.6,31)
NetR64_2: R64.2 U1.32 U9.55 | length 63.8
  Top Layer w0.2: R64.2@12.75,51.85 12.75,50.85 11.9,50 U1.32@11.9,48.75 11.9,38.276 14.585,35.59 14.923,35.59 v2(14.957,35.557) ; U9.55@56.47,30.5 v2(57.5,30.5)
  Bottom Layer w0.2: v2(14.957,35.557) 15.713,34.8 50.691,34.8 54.991,30.5 v2(57.5,30.5)
NetR65_1: R65.1 U9.38 | length 69.2
  Top Layer w0.2: v2(50.7,25.2) 50.75,25.25 U9.38@50.75,26.78 ; v2(98.7,40.4) 98.7,39.45 R65.1@98.75,39.4
  Inner Layer 4 w0.2: v2(63.2,39.3) 63.2,39.219 63.3,39.119 v2(63.3,25.7)
  Bottom Layer w0.2: v2(50.7,25.2) 50.739,25.161 51.039,25.161 52.1,24.1 61.7,24.1 v2(63.3,25.7) ; v2(63.2,39.3) 63.6,39.7 74.2,39.7 76.557,37.343 97.943,37.343 98.7,38.1 v2(98.7,40.4)
NetR66_1: R66.1 U9.43 | length 48.7
  Top Layer w0.2: v2(53.146,25.2) 53.15,25.204 53.15,25.75 53.25,25.85 U9.43@53.25,26.78 ; v2(96.7,21) R66.1@97.6,21
  Bottom Layer w0.2: v2(53.146,25.2) 54.1,25.2 55.2,26.3 64.1,26.3 65.9,24.5 65.912,24.5 68.789,21.623 86.6,21.623 86.602,21.621 86.998,21.621 87,21.623 95.977,21.623 96.6,21 v2(96.7,21)
NetR67_1: R67.1 U9.18 | length 4.4
  Top Layer w0.2: R67.1@44,36.5 44.25,36.25 45,36.25 46.75,34.5 U9.18@47.53,34.5
NetR68_1: R68.1 U10.4 | length 4.5
  Top Layer w0.25: R68.1@76.35,65.5 76.59,65.26 76.59,64.81 76.9,64.5 77.9,64.5 78.4,65 U10.4@80.009,65
NetR68_2: R68.2 U10.3 U13.20 | length 12.1
  Top Layer w0.25: U13.20@76.525,59.175 76.538,59.188 77.886,59.188 v2(77.898,59.2) ; v2(77.9,66.5) 77.9,65.75 R68.2@77.65,65.5 U10.3@80.009,65.5
  Inner Layer 4 w0.25: v2(77.898,59.2) 77.9,59.202 77.9,61.89 77.898,61.892 77.898,62.308 77.9,62.31 v2(77.9,66.5)
NetR69_1: R69.1 U11.4 | length 3.8
  Top Layer w0.25: R69.1@76.6,49.25 76.6,49.2 76.9,48.9 76.95,48.9 77.35,48.5 78.7,48.5 78.867,48.667 U11.4@80.009,48.667
NetR69_2: R69.2 U11.3 U13.16 | length 11.7
  Top Layer w0.25: U13.16@76.525,56.575 77.896,56.575 v2(77.898,56.573) ; v2(77.3,50.4) 77.746,49.954 77.746,49.404 R69.2@77.9,49.25 77.983,49.167 U11.3@80.009,49.167
  Inner Layer 4 w0.25: v2(77.3,50.4) 77.252,50.448 77.252,50.619 77.2,50.671 77.2,56.427 77.346,56.573 v2(77.898,56.573)
NetR70_2: R70.2 U12.4 U20.11 | length 38.4
  Top Layer w0.2: U20.11@72.75,41.975 72.75,42.75 v2(72.8,42.8) ; R70.2@90.9,58.25 90.9,57.381 91,57.281 v2(91,57.2)
  Top Layer w0.25: R70.2@90.9,58.25 U12.4@92.509,58.25
  Inner Layer 4 w0.2: v2(72.8,42.8) 72.8,58.377 v2(72.823,58.4)
  Bottom Layer w0.2: v2(72.823,58.4) 90.8,58.4 91,58.2 v2(91,57.2)
NetR71_1: R71.1 U10.19 | length 2.2
  Top Layer w0.25: U10.19@83.992,64 85.1,64 85.4,63.7 R71.1@86.1,63.7
NetR71_2: R71.2 U10.18 U13.18 | length 23
  Top Layer w0.25: U13.18@76.525,57.875 77.875,57.875 v2(77.9,57.9) ; U10.18@83.992,63.5 84.9,63.5 85.5,62.9 87.1,62.9 87.3,63.1 87.3,63.6 R71.2@87.4,63.7 v2(88.4,63.7)
  Inner Layer 4 w0.25: v2(88.4,57.9) v2(88.4,63.7)
  Bottom Layer w0.25: v2(77.9,57.9) v2(88.4,57.9)
NetR72_1: R72.1 U11.19 | length 1.9
  Top Layer w0.25: U11.19@83.992,47.667 85.683,47.667 R72.1@85.85,47.5
NetR72_2: R72.2 U11.18 U13.15 | length 26.3
  Top Layer w0.25: U13.15@76.525,55.925 77.896,55.925 v2(77.898,55.927) ; U11.18@83.992,47.167 84.981,47.167 85.336,46.811 86.364,46.811 86.703,47.15 86.85,47.15 87.15,47.45 R72.2@87.15,47.5 v2(88.9,47.5)
  Inner Layer 4 w0.25: v2(88.9,47.5) 88.9,47.568 89,47.668 v2(89,55.9)
  Bottom Layer w0.25: v2(77.898,55.927) 77.925,55.9 v2(89,55.9)
NetR73_2: R73.2 U12.9 U23.4 | length 81.1
  Top Layer w0.2: R73.2@98.25,58.4 98.3,58.4 98.625,58.725 98.625,58.775 98.75,58.9 v2(99.3,58.9)
  Top Layer w0.25: v2(66.898,16.2) 66.9,16.2 U23.4@66.9,15.492 ; U12.9@95.491,59.25 97.4,59.25 97.9,58.75 97.9,58.7 98.2,58.4 R73.2@98.25,58.4
  Inner Layer 4 w0.2: v2(66.898,16.2) 66.898,18.857 66.873,18.882 66.873,27.718 66.877,27.722 66.877,34.018 66.873,34.022 66.873,43.248 66.877,43.252 66.877,50.818 66.873,50.822 66.873,57.673 67.3,58.1 v2(67.3,59.6)
  Bottom Layer w0.2: v2(67.3,59.6) 67.357,59.657 67.548,59.657 67.567,59.677 90.898,59.677 91.052,59.523 98.677,59.523 v2(99.3,58.9)
NetR74_1: R74.1 U10.22 | length 2.2
  Top Layer w0.25: U10.22@83.992,65.5 85.85,65.5 R74.1@86.1,65.25
NetR74_2: R74.2 U10.21 U13.17 | length 26.1
  Top Layer w0.25: U13.17@76.525,57.225 76.543,57.208 77.114,57.208 77.122,57.2 v2(77.9,57.2) ; U10.21@83.992,65 84.8,65 85.3,64.5 86.65,64.5 87.05,64.9 87.1,64.9 87.4,65.2 R74.2@87.4,65.25 88.882,65.25 88.932,65.2 v2(89,65.2)
  Inner Layer 4 w0.25: v2(89,57.2) v2(89,65.2)
  Bottom Layer w0.25: v2(77.9,57.2) v2(89,57.2)
NetR75_1: R75.1 U11.22 | length 1.9
  Top Layer w0.25: U11.22@83.992,49.167 85.767,49.167 R75.1@85.85,49.25
NetR75_2: R75.2 U11.21 U13.14 | length 22.5
  Top Layer w0.25: U13.14@76.525,55.275 76.543,55.292 77.114,55.292 77.122,55.3 v2(77.898,55.3) ; U11.21@83.992,48.667 85.033,48.667 85.3,48.4 86.3,48.4 86.8,48.9 86.85,48.9 87.15,49.2 R75.2@87.15,49.25 88.182,49.25 88.232,49.3 v2(88.3,49.3)
  Inner Layer 4 w0.25: v2(88.2,55.3) 88.2,55.232 88.3,55.132 v2(88.3,49.3)
  Bottom Layer w0.25: v2(77.898,55.3) v2(88.2,55.3)
NetR76_2: R76.2 U12.8 | length 2
  Top Layer w0.25: U12.8@95.491,58.75 96.55,58.75 96.746,58.554 96.746,57.904 R76.2@96.75,57.9
NetR77_1: R77.1 U20.7 | length 33.7
  Top Layer w0.2: U20.7@74.75,41.975 74.75,42.85 v2(74.8,42.9) ; v2(74.8,70.1) 80,70.1 R77.1@80.1,70
  Inner Layer 4 w0.2: v2(74.8,42.9) 74.8,47.4 74.511,47.689 74.511,48.42 74.8,48.709 v2(74.8,70.1)
NetR77_2: R77.2 R78.2 U10.28 | length 4.6
  Top Layer w0.2: U10.28@81.75,66.999 81.75,67.55 81.6,67.7 81.6,68.3 81.4,68.5 R77.2@81.4,70 R78.2@82.85,70
NetR79_2: R79.2 U14.4 U20.13 | length 26.8
  Top Layer w0.2: v2(70.3,42.2) 70.3,41.8 70.85,41.25 U20.13@71.525,41.25 ; v2(90.9,43.2) R79.2@90.9,45.5
  Top Layer w0.25: R79.2@90.9,45.5 U14.4@92.509,45.5
  Bottom Layer w0.2: v2(70.3,42.2) 70.357,42.257 70.525,42.257 70.567,42.3 77.2,42.3 78,43.1 90.8,43.1 v2(90.9,43.2)
NetR80_2: R80.2 U14.9 U23.6 | length 73.6
  Top Layer w0.2: U23.6@65.9,15.492 65.9,16.198 v2(65.902,16.2) ; R80.2@98.25,46.15 98.27,46.17 98.27,46.97 v2(98.3,47)
  Top Layer w0.25: U14.9@95.491,46.5 97.85,46.5 98.2,46.15 R80.2@98.25,46.15
  Inner Layer 4 w0.2: v2(65.9,49.8) 65.9,46.695 65.823,46.618 65.823,29.382 65.902,29.303 v2(65.902,16.2) ; v2(98.2,49.3) 98.2,49.219 98.3,49.119 v2(98.3,47)
  Bottom Layer w0.2: v2(65.9,49.8) 66.377,49.323 79.298,49.323 80.002,50.027 97.473,50.027 v2(98.2,49.3)
NetR81_2: R81.2 U14.8 | length 1.4
  Top Layer w0.25: U14.8@95.491,46 96.35,46 96.7,45.65 R81.2@96.75,45.65
NetR82_1: R82.1 U16.4 | length 3.4
  Top Layer w0.25: R82.1@77.1,15.25 77.1,15.2 77.4,14.9 77.45,14.9 77.95,14.4 79.1,14.4 79.45,14.75 U16.4@80.009,14.75
NetR82_2: R82.2 U15.20 U16.3 | length 14.5
  Top Layer w0.25: U15.20@76.275,25.925 78.257,25.925 78.332,26 v2(78.4,26) ; v2(78.4,16.1) R82.2@78.4,15.25 U16.3@80.009,15.25
  Inner Layer 4 w0.25: v2(78.4,16.1) v2(78.4,26)
NetR83_1: R83.1 U17.4 | length 3.6
  Top Layer w0.25: R83.1@76.85,32.75 76.85,32.7 77.15,32.4 77.2,32.4 77.6,32 78.8,32 79.133,32.333 U17.4@80.009,32.333
NetR83_2: R83.2 U15.16 U17.3 | length 15.7
  Top Layer w0.25: U15.16@76.275,23.325 77.425,23.325 v2(77.5,23.4) ; v2(77,34) 77.85,33.15 77.85,33.05 R83.2@78.15,32.75 79.15,32.75 79.233,32.833 U17.3@80.009,32.833
  Inner Layer 4 w0.25: v2(77,34) 77,23.9 v2(77.5,23.4)
NetR84_1: R84.1 U16.19 | length 2.2
  Top Layer w0.25: U16.19@83.992,13.75 85.85,13.75 R84.1@86.1,13.5
NetR84_2: R84.2 U15.18 U16.18 | length 27.4
  Top Layer w0.25: U15.18@76.275,24.625 76.293,24.608 76.869,24.608 76.877,24.6 v2(77.502,24.6) ; U16.18@83.992,13.25 84.85,13.25 85.4,12.7 86.7,12.7 87.1,13.1 87.1,13.2 R84.2@87.4,13.5 87.4,13.55 87.7,13.85 87.75,13.85 v2(88.2,14.3)
  Inner Layer 4 w0.25: v2(88.2,14.3) v2(88.2,24.6)
  Bottom Layer w0.25: v2(77.502,24.6) v2(88.2,24.6)
NetR85_1: R85.1 U17.19 | length 2
  Top Layer w0.25: U17.19@83.992,31.333 85.55,31.333 85.85,31.033 R85.1@85.85,31
NetR85_2: R85.2 U15.15 U17.18 | length 25.7
  Top Layer w0.25: U15.15@76.275,22.675 76.293,22.692 76.864,22.692 76.872,22.7 v2(77.898,22.7) ; U17.18@83.992,30.833 84.567,30.833 85.1,30.3 86.45,30.3 86.8,30.65 86.85,30.65 87.15,30.95 R85.2@87.15,31 87.25,30.9 v2(87.9,30.9)
  Inner Layer 4 w0.25: v2(87.9,30.9) 87.9,26 88.8,25.1 v2(88.8,22.6)
  Bottom Layer w0.25: v2(77.898,22.7) 77.966,22.7 78.066,22.6 v2(88.8,22.6)
NetR86_1: R86.1 U16.22 | length 2.3
  Top Layer w0.25: U16.22@83.992,15.25 85.35,15.25 85.496,15.104 86.046,15.104 R86.1@86.15,15
NetR86_2: R86.2 U15.17 U16.21 | length 24.2
  Top Layer w0.25: U15.17@76.275,23.975 77.873,23.975 v2(77.898,24) ; U16.21@83.992,14.75 84.85,14.75 85.289,14.311 86.811,14.311 87.45,14.95 R86.2@87.45,15 87.48,15.03 87.48,15.88 v2(87.5,15.9)
  Inner Layer 4 w0.25: v2(87.5,15.9) v2(87.5,24)
  Bottom Layer w0.25: v2(77.898,24) v2(87.5,24)
NetR87_1: R87.1 U17.22 | length 2
  Top Layer w0.25: U17.22@83.992,32.833 85.617,32.833 R87.1@85.85,32.6
NetR87_2: R87.2 U15.14 U17.21 | length 26.9
  Top Layer w0.25: U15.14@76.275,22.025 77.357,22.025 77.432,22.1 v2(77.5,22.1) ; U17.21@83.992,32.333 84.667,32.333 85.1,31.9 86.9,31.9 87,32 87,32.45 R87.2@87.15,32.6 v2(88.1,32.6)
  Inner Layer 4 w0.25: v2(86.8,22.098) 86.8,22.144 86.575,22.369 86.575,31.562 87.613,32.6 v2@88.075,32.6
  Bottom Layer w0.25: v2(77.5,22.1) 86.798,22.1 v2(86.8,22.098)
NetR88_2: R88.2 U18.4 U20.15 | length 57.3
  Top Layer w0.2: v2(69.9,40.2) 69.95,40.25 U20.15@71.525,40.25 ; R88.2@90.9,9.25 90.9,8.281 91,8.181 v2(91,8.1)
  Top Layer w0.25: R88.2@90.9,9.25 U18.4@92.509,9.25
  Inner Layer 4 w0.2: v2(69.9,40.2) 69.1,39.4 69.1,37.2 69.6,36.7 69.6,27 70.3,26.3 v2(70.3,9.4)
  Bottom Layer w0.2: v2(70.3,9.4) 89.7,9.4 v2(91,8.1)
NetR89_2: R89.2 U18.9 U23.3 | length 48.1
  Top Layer w0.2: R89.2@98.25,9.8 98.458,9.592 98.908,9.592 99.4,9.1 v2(99.4,8.7)
  Top Layer w0.25: U23.3@67.4,15.492 v2(67.4,16.8) ; U18.9@95.491,10.25 97.754,10.25 97.9,10.104 97.9,10.1 98.2,9.8 R89.2@98.25,9.8
  Inner Layer 4 w0.2: v2(73.1,16.8) 73.1,9.5 73.7,8.9 v2(73.7,8.1)
  Bottom Layer w0.2: v2(67.4,16.8) v2(73.1,16.8) ; v2(73.7,8.1) 73.977,7.823 88.977,7.823 89.7,7.1 98.8,7.1 99.4,7.7 v2(99.4,8.7)
NetR90_2: R90.2 U18.8 | length 1.4
  Top Layer w0.25: U18.8@95.491,9.75 96.15,9.75 96.2,9.7 96.3,9.7 96.7,9.3 R90.2@96.75,9.3
NetR91_2: R91.2 U19.4 U20.17 | length 38.6
  Top Layer w0.2: v2(70.4,39.2) 70.45,39.25 U20.17@71.525,39.25 ; v2(90.9,23.5) R91.2@90.9,24.5
  Top Layer w0.25: R91.2@90.9,24.5 U19.4@92.509,24.5
  Inner Layer 4 w0.2: v2(90.7,36.866) 90.757,36.808 90.757,36.016 90.9,35.873 v2(90.9,23.5)
  Bottom Layer w0.2: v2(70.4,39.2) 74.209,39.2 76.731,36.678 90.433,36.678 90.621,36.866 v2(90.7,36.866)
NetR92_2: R92.2 U19.9 U23.18 | length 58.3
  Top Layer w0.2: R92.2@98.2,25.15 98.944,25.15 99.194,25.4 v2(99.2,25.4)
  Top Layer w0.25: v2(65.4,10.3) U23.18@65.4,11.509 ; U19.9@95.491,25.5 97.85,25.5 R92.2@98.2,25.15
  Inner Layer 4 w0.2: v2(99.2,25.4) 98.8,25 98.8,10.2 v2(100.2,8.8)
  Bottom Layer w0.2: v2(65.4,10.3) 65.467,10.3 65.667,10.1 99.5,10.1 100.2,9.4 v2(100.2,8.8)
NetR93_2: R93.2 U19.8 | length 1.4
  Top Layer w0.25: U19.8@95.491,25 96.35,25 96.7,24.65 R93.2@96.75,24.65
NetR94_2: R94.2 U20.18 U20.23 | length 8.8
  Top Layer w0.2: v2(70.9,36.602) 70.843,36.659 70.843,36.827 70.8,36.869 70.8,38.025 71.272,38.497 71.272,38.718 71.305,38.75 U20.18@71.525,38.75 ; U20.23@74.25,38.025 74.25,37.716 74.3,37.666 v2(74.3,36.8) 74.3,36.733 74.5,36.533 R94.2@74.5,35.65
  Bottom Layer w0.2: v2(70.9,36.602) 70.957,36.545 71.447,36.545 71.603,36.389 73.389,36.389 73.8,36.8 v2(74.3,36.8)
NetR95_2: R95.2 U20.24 | length 2.1
  Top Layer w0.2: U20.24@74.75,38.025 74.75,37.5 75.375,36.875 75.525,36.875 75.85,36.55 R95.2@75.85,36.5
NetR96_1: R96.1 U1.25 U7.D6 U7.H6 | length 20.3
  Top Layer w0.2: U1.25@19.5,45.715 20.785,45.715 v2(20.8,45.7) ; U7.D6@29.46,47.54 29.56,47.54 v2(30.1,47) ; v2(33.9,47) 34.44,47.54 U7.H6@34.54,47.54 34.622,47.622 34.622,47.922 35.1,48.4 35.1,50.7 R96.1@35.25,50.85
  Bottom Layer w0.2: v2(20.8,45.7) 21.6,46.5 29.6,46.5 v2(30.1,47) v2(33.9,47)
NetR97_1: R97.1 U9.57 | length 39.5
  Top Layer w0.2: R97.1@51.05,2.1 51.058,2.092 51.058,1.442 51.6,0.9 v2(55.3,0.9) ; U9.57@56.47,31.5 v2(58.1,31.5)
  Inner Layer 4 w0.2: v2(55.3,0.9) 55.3,7.6 54.6,8.3 54.6,28.7 57.4,31.5 v2(58.1,31.5)
NetR98_1: R98.1 U9.59 | length 36
  Top Layer w0.2: v2(54.3,1.9) 54.367,1.9 54.567,2.1 R98.1@55.45,2.1 ; U9.59@56.47,32.5 57.519,32.5 57.532,32.513 v2(58.113,32.513)
  Inner Layer 4 w0.2: v2(54.3,1.9) 54.3,1.967 54,2.267 54,29.5 57.013,32.513 v2(58.113,32.513)
NetR99_1: R99.1 U9.31 | length 34.6
  Top Layer w0.2: v2(46.6,28) U9.31@47.53,28 ; R99.1@46.85,2.1 46.85,1.25 47.017,1.083 47.183,1.083 47.3,1.2 v2(50,1.2)
  Inner Layer 4 w0.2: v2(46.6,28) 46.657,27.943 46.825,27.943 46.867,27.9 48.7,27.9 50.2,26.4 50.2,4.2 50,4 v2(50,1.2)
NetR100_1: R100.1 U9.58 | length 32
  Top Layer w0.2: R100.1@51.05,6.3 51.375,6.625 51.375,6.775 51.9,7.3 v2(54.8,7.3) ; U9.58@56.47,32 v2(57.6,32)
  Inner Layer 4 w0.2: v2(54.8,7.3) 54.3,7.8 54.3,29.2 57.2,32.1 57.5,32.1 v2(57.6,32)
NetR101_1: R101.1 U9.60 | length 31.8
  Top Layer w0.2: v2(53.523,6.3) R101.1@55.35,6.3 ; U9.60@56.47,33 v2(57.6,33)
  Inner Layer 4 w0.2: v2(53.523,6.3) 53.523,6.381 53.7,6.558 53.7,29.9 56.8,33 v2(57.6,33)